# EAGLE board TSC_PROIECT_BOARD (EAGLE 9.7.0), part 1 of 2
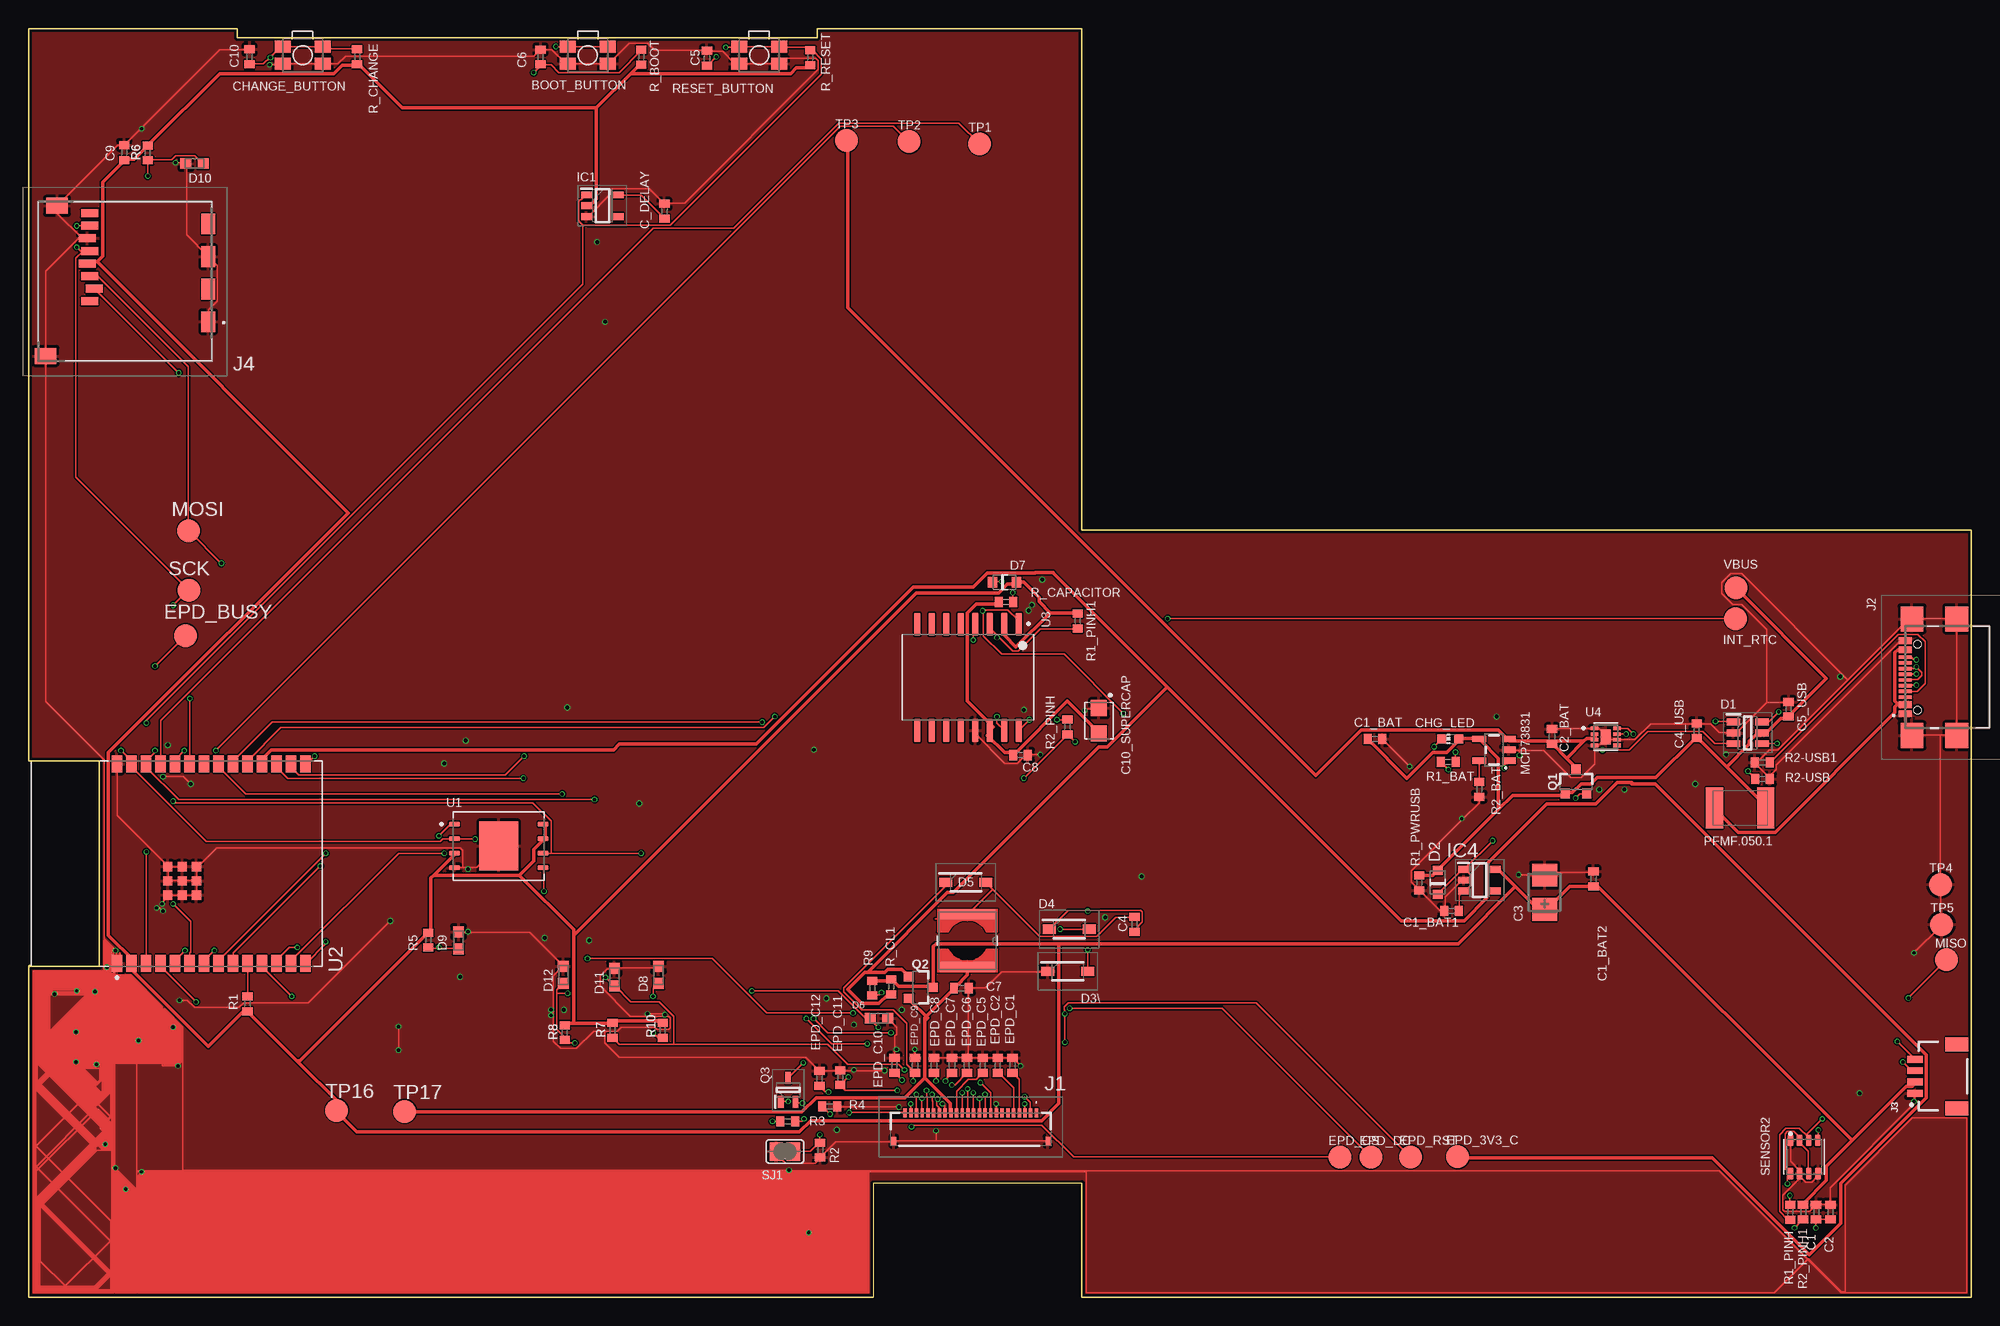
[diagram p0: board, top side]
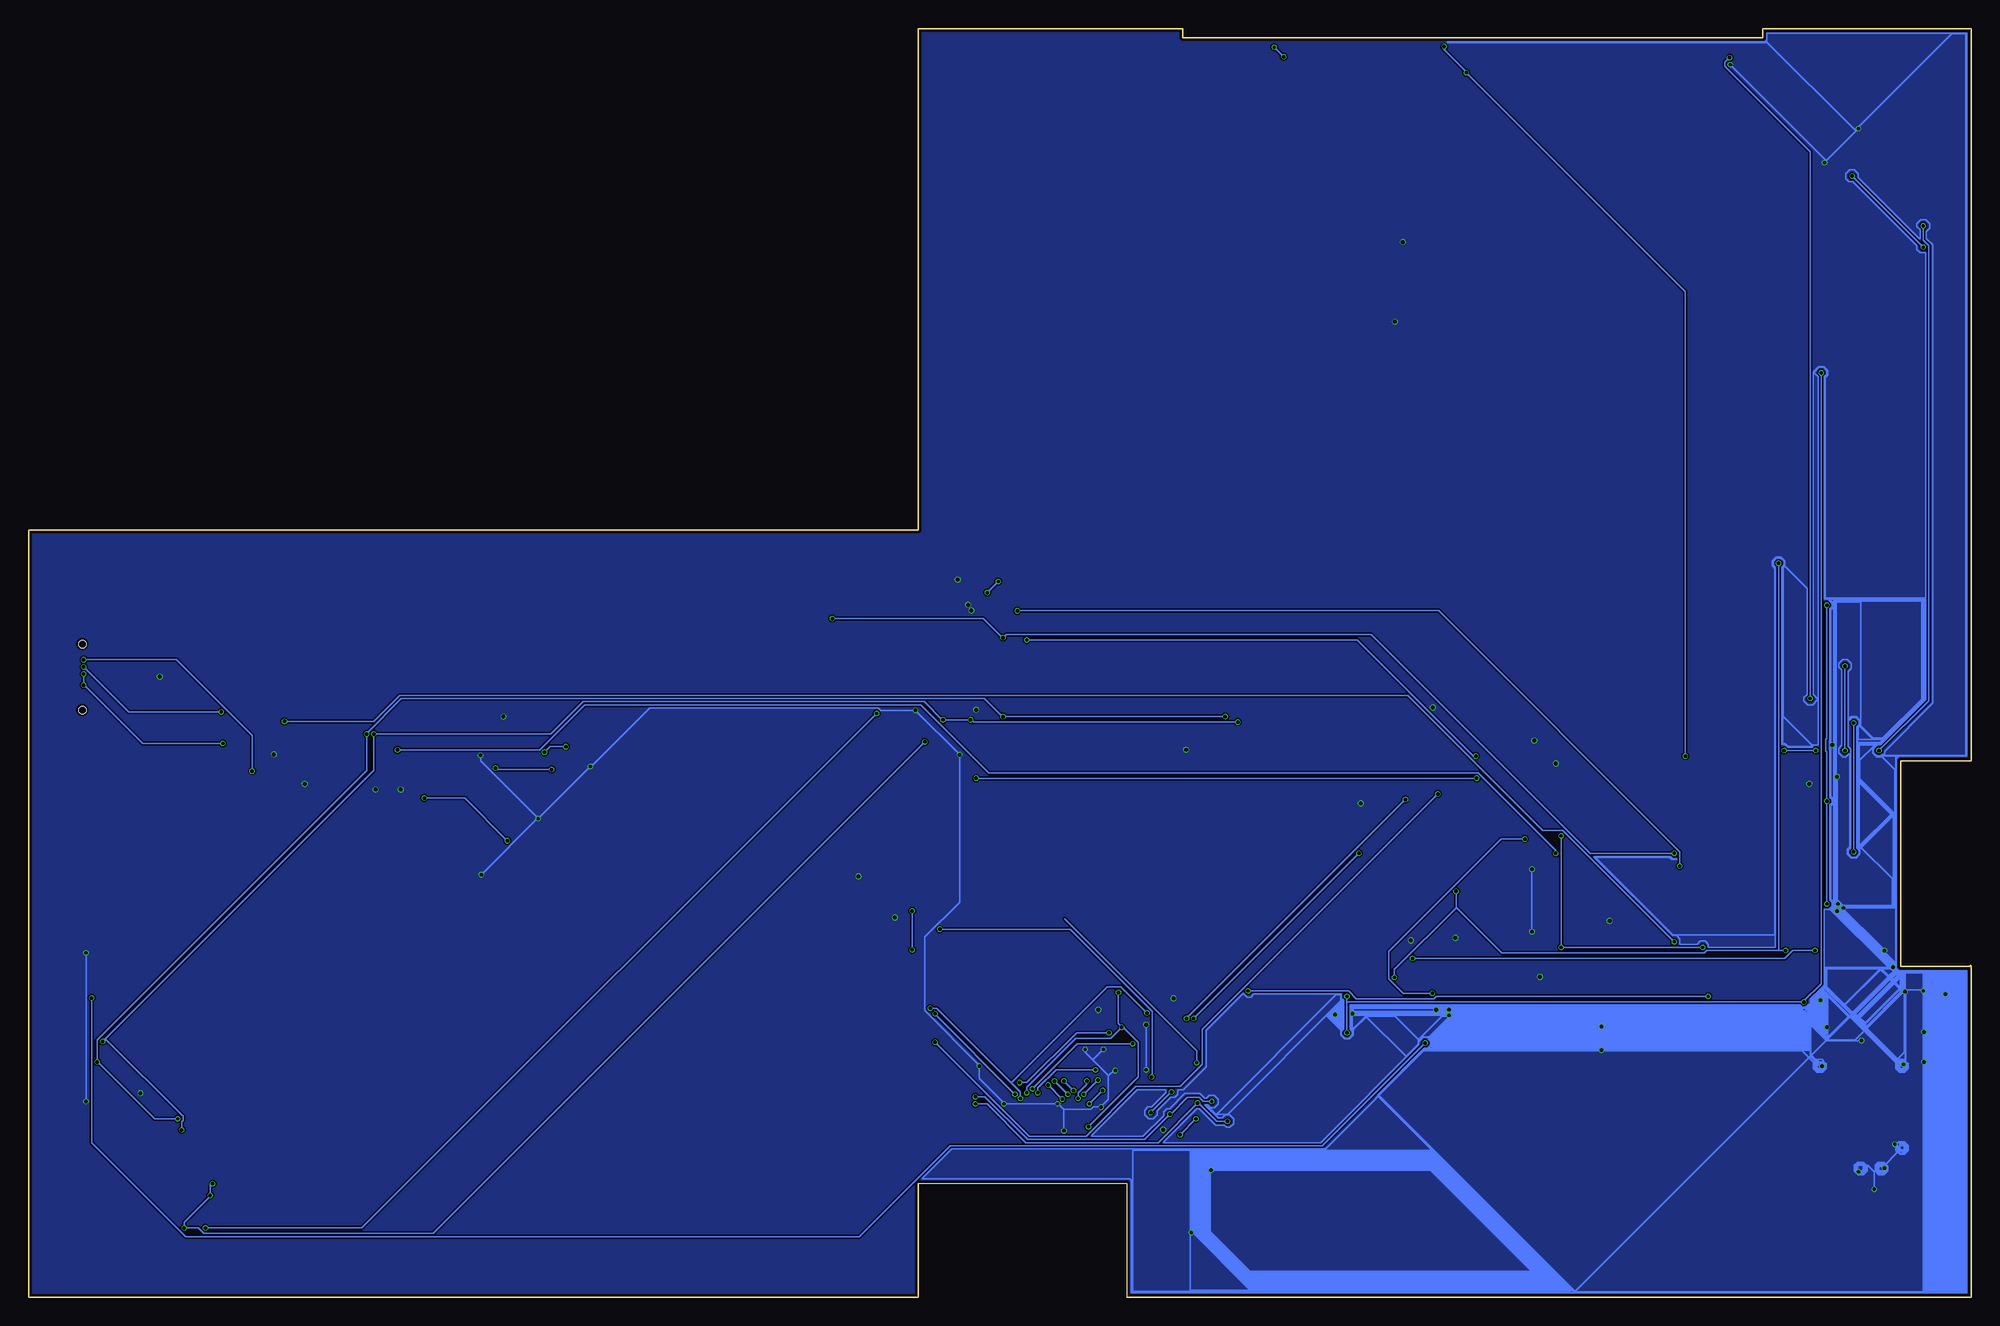
[diagram p1: board, bottom side, seen from below]

Size 170.2 x 111.2 mm. Coordinates in mm from the lower left corner, seen from the top.
Outline: 0,29 0,0 74,0 74,10 92.27,10 92.27,0 170.2,0 170.2,67.24 92.27,67.24 92.27,111.2 69.1,111.2 69.1,110.4 18.3,110.4 18.3,111.2 0,111.2 0,47 6.2,47 6.2,29 0,29
Outline: 0,29 0.1,29.1
Copper layers (1*16): Top 0.035mm / dielectric 1.6mm / Bottom 0.035mm
Design rules "jlcpcb-2layers.dru *": minimum track width 0.15mm, minimum drill 0.3mm, track to track 5mil, track to pad 5mil, pad to pad 5mil, via to via 5mil, smd to smd 5mil, copper to edge 0.2mm, drill to drill 6mil, minimum pad ring 10mil, minimum via ring 3mil, stop-mask expansion 4mil, vias tented up to drill 0mil, thermal gap 10mil
Net classes: 0 default: width 0.15 mm; 1 power: width 0.3 mm
Holes 0.35 mm at 286.6,1.3

## Footprints (pad centres in the part's own frame; a part is rotated, then mirrored left to right if it is on the bottom)
MYBUTTON = smd 1.4 x 1.05: 1 1.75,0.75; 2 -1.75,0.75; 3 -1.75,-0.75; 4 1.75,-0.75
ESP32_WROVER_EAGLE-LTSPICE_C0402 = smd 0.7 x 0.9: 1 -0.65,0; 2 0.65,0
RCL_CT3528 = smd 2 x 2.2: + -1.5,0; - 1.5,0
CAPCP3225X100N = smd 1.4 x 1.4: 1 -1.1,0; 2 1.1,0
ADAFRUIT_CHIP-LED0603 = smd 0.8 x 0.8: A 0,-0.75; C 0,0.75
SOT95P280X145-6N = smd 1.2 x 0.6: 1 -1.25,0.95; 2 -1.25,0; 3 -1.25,-0.95; 4 1.25,-0.95; 5 1.25,0; 6 1.25,0.95
ESP32_WROVER_AVX---SD0805S020S1R0_AVX_SD0805S020S1R0_0 = smd 0.8 x 0.9: 1 -1.05,0; 2 1.05,0
SOD3716X135N = smd 1.15 x 0.8: 1 -1.75,0; 2 1.75,0
DIOC1608X36N = smd 0.97 x 0.94: 1 -0.75,0; 2 0.75,0
TP20R = smd 2 x 2: TP 0,0
SOT95P280X125-5N = smd 0.9 x 0.6: 1 -1.4,0.95; 2 -1.4,0; 3 -1.4,-0.95; 4 1.4,-0.95; 5 1.4,0.95
SOT95P280X120-5N = smd 0.9 x 0.6: 1 -1.4,0.95; 2 -1.4,0; 3 -1.4,-0.95; 4 1.4,-0.95; 5 1.4,0.95
FH34SRJ24S05SH99 = smd 0.3 x 0.8: 1 5.75,1.45; 2 5.25,1.45; 3 4.75,1.45; 4 4.25,1.45; 5 3.75,1.45; 6 3.25,1.45; 7 2.75,1.45; 8 2.25,1.45; 9 1.75,1.45; 10 1.25,1.45; 11 0.75,1.45; 12 0.25,1.45; 13 -0.25,1.45; 14 -0.75,1.45; 15 -1.25,1.45; 16 -1.75,1.45; 17 -2.25,1.45; 18 -2.75,1.45; 19 -3.25,1.45; 20 -3.75,1.45; 21 -4.25,1.45; 22 -4.75,1.45; 23 -5.25,1.45; 24 -5.75,1.45 | smd 0.4 x 0.8: MP1 6.75,-1.05; MP2 -6.75,-1.05
SAMACSYS_PARTS_USB4110GFA = smd 0.3 x 1.15: A1 -3.35,3.678; A4 -2.55,3.678; A5 -1.25,3.678; A6 -0.25,3.678; A7 0.25,3.678; A8 1.25,3.678; A9 2.55,3.678; A12 3.35,3.678; B1 3.05,3.678; B4 2.25,3.678; B5 1.75,3.678; B6 0.75,3.678; B7 -0.75,3.678; B8 -1.75,3.678; B9 -2.25,3.678; B12 -3.05,3.678 | smd 2.18 x 2: MP1 -5.11,-0.827; MP2 5.11,-0.827; MP3 -5.11,3.103; MP4 5.11,3.103 | hole 0.65: -2.89,2.603; 2.89,2.603
JST04_1MM_RA = smd 0.6 x 1.35: 1 -1.5,0; 2 -0.5,0; 3 0.5,0; 4 1.5,0 | smd 1.2 x 2: NC1 2.8,-3.675; NC2 -2.8,-3.675
112ATAARR03ATTEND = smd 1.8 x 1.2: G1 10.6,10.4; G2 4.9,10.4; S1 7.75,10.4; S2 2.05,10.4 | smd 1.4 x 1.9: G3 13.6,-3.85; G4 0.45,-2.85 | smd 0.7 x 1.5: P1 8.8,0; P2 7.7,0.4; P3 6.6,0; P4 5.5,-0.2; P5 4.4,0; P6 3.3,-0.2; P7 2.2,0; P8 1.1,0
IND_4828-WE-TPC_WRE = smd 0.889 x 4.826: 1 -2.286,0; 2 2.286,0
ESP32_WROVER_SPARKFUN-IC-POWER_SOT23-5 = smd 0.55 x 1.2: 1 -0.95,-1.3; 2 0,-1.3; 3 0.95,-1.3; 4 0.95,1.3; 5 -0.95,1.3
ESP32C6_VARISTOR_CT/CN1812 = smd 1.5 x 3.6: 1 -2.25,0; 2 2.25,0
ESP32_WROVER_SPARKFUN-DISCRETESEMI_SOT23-3 = smd 0.8 x 0.9: 1 -0.95,-1; 2 0.95,-1; 3 0,1.1
SOT65P210X110-3N = smd 1.05 x 0.5: 1 -1.05,0.65; 2 -1.05,-0.65; 3 1.05,0
ESP32_WROVER_EAGLE-LTSPICE_R0402 = smd 0.7 x 0.9: 1 -0.65,0; 2 0.65,0
ESP32_WROVER_BME680_PSON80P300X300X100-8N = smd 1.016 x 0.5: 1 1.458,1.2; 2 1.458,0.4; 3 1.458,-0.4; 4 1.458,-1.2; 5 -1.458,-1.22; 6 -1.458,-0.4; 7 -1.458,0.4; 8 -1.458,1.2
SJ = smd 1.168 x 1.6: 1 -0.762,0; 2 0.762,0
SON127P600X800X80-9N = smd 0.94 x 0.44: 1 -3.895,1.905; 2 -3.895,0.635; 3 -3.895,-0.635; 4 -3.895,-1.905; 5 3.895,-1.905; 6 3.895,-0.635; 7 3.895,0.635; 8 3.895,1.905 | smd 3.4 x 4.3: 9 0,0
XCVR_ESP32-C6-WROOM-1-N8 = smd 1.5 x 0.9: 1 -8.75,5.26; 2 -8.75,3.99; 3 -8.75,2.72; 4 -8.75,1.45; 5 -8.75,0.18; 6 -8.75,-1.09; 7 -8.75,-2.36; 8 -8.75,-3.63; 9 -8.75,-4.9; 10 -8.75,-6.17; 11 -8.75,-7.44; 12 -8.75,-8.71; 13 -8.75,-9.98; 14 -8.75,-11.25; 15 8.75,-11.25; 16 8.75,-9.98; 17 8.75,-8.71; 18 8.75,-7.44; 19 8.75,-6.17; 20 8.75,-4.9; 21 8.75,-3.63; 22 8.75,-2.36; 23 8.75,-1.09; 24 8.75,0.18; 25 8.75,1.45; 26 8.75,2.72; 27 8.75,3.99; 28 8.75,5.26 | smd 0.8 x 0.8: 29_1 -2.755,0.79; 29_2 -1.505,0.79; 29_3 -0.255,0.79; 29_4 -2.755,-0.46; 29_5 -1.505,-0.46; 29_6 -0.255,-0.46; 29_7 -2.755,-1.71; 29_8 -1.505,-1.71; 29_9 -0.255,-1.71
SOIC127P1032X265-16N = smd 2.05 x 0.59: 1 -4.655,4.445; 2 -4.655,3.175; 3 -4.655,1.905; 4 -4.655,0.635; 5 -4.655,-0.635; 6 -4.655,-1.905; 7 -4.655,-3.175; 8 -4.655,-4.445; 9 4.655,-4.445; 10 4.655,-3.175; 11 4.655,-1.905; 12 4.655,-0.635; 13 4.655,0.635; 14 4.655,1.905; 15 4.655,3.175; 16 4.655,4.445
SON50P200X200X80-9N = smd 0.762 x 0.3: 1 -0.985,0.75 | smd 0.76 x 0.3: 2 -0.985,0.25; 3 -0.985,-0.25; 4 -0.985,-0.75; 5 0.985,-0.75; 6 0.985,-0.25; 7 0.985,0.25; 8 0.985,0.75 | smd 0.9 x 1.3: 9 0,0

## Placement (x,y rotation side)
BOOT_BUTTON  BUTTON_CUSYOMV1  [MYBUTTON]  49,108.85 180 top
C1  100nF  [ESP32_WROVER_EAGLE-LTSPICE_C0402]  156.59,7.48 90 top
C1_BAT  4.7uF  [ESP32_WROVER_EAGLE-LTSPICE_C0402]  117.95,48.95 0 top
C1_BAT1  4.7uF  [ESP32_WROVER_EAGLE-LTSPICE_C0402]  124.65,33.87 180 top
C1_BAT2  4.7uF  [ESP32_WROVER_EAGLE-LTSPICE_C0402]  137.09,36.67 90 top
C2  100nF  [ESP32_WROVER_EAGLE-LTSPICE_C0402]  157.86,7.49 90 top
C2_BAT  4.7uF  [ESP32_WROVER_EAGLE-LTSPICE_C0402]  133.46,49.15 90 top
C3  100uF TANT  [RCL_CT3528]  132.81,35.5 90 top
C4  4.7uF/25V  [ESP32_WROVER_EAGLE-LTSPICE_C0402]  96.89,32.69 90 top
C4_USB  100nF  [ESP32_WROVER_EAGLE-LTSPICE_C0402]  146.13,49.67 90 top
C5  1uF  [ESP32_WROVER_EAGLE-LTSPICE_C0402]  59.43,108.59 90 top
C5_USB  4.7uF  [ESP32_WROVER_EAGLE-LTSPICE_C0402]  154.18,51.55 90 top
C6  100nF  [ESP32_WROVER_EAGLE-LTSPICE_C0402]  44.85,108.71 90 top
C7  10uF  [ESP32_WROVER_EAGLE-LTSPICE_C0402]  81.72,27.11 0 top
C8  100nF  [ESP32_WROVER_EAGLE-LTSPICE_C0402]  86.9,47.53 0 top
C9  100nF  [ESP32_WROVER_EAGLE-LTSPICE_C0402]  8.38,100.33 90 top
C10  100nF  [ESP32_WROVER_EAGLE-LTSPICE_C0402]  19.36,108.73 90 top
C10_SUPERCAP  CPH3225A  [CAPCP3225X100N]  93.76,50.54 270 top
C_DELAY  100nF  [ESP32_WROVER_EAGLE-LTSPICE_C0402]  55.71,95.19 90 top
CHANGE_BUTTON  BUTTON_CUSYOMV1  [MYBUTTON]  24.01,108.85 180 top
CHG_LED  [ADAFRUIT_CHIP-LED0603]  124.54,48.95 90 top
D1  USBLC6-2SC6Y  [SOT95P280X145-6N]  150.6,49.47 0 top
D2  ESP32_WROVER_AVX---SD0805S020S1R0_AVX_SD0805S020S1R0_0_0AVX_SD0805S020S1R0_0_0  [ESP32_WROVER_AVX---SD0805S020S1R0_AVX_SD0805S020S1R0_0]  123.44,36.38 90 top
D3\  MBR0530  [SOD3716X135N]  91.03,28.58 0 top
D4  MBR0530  [SOD3716X135N]  91.17,32.28 0 top
D5  MBR0530  [SOD3716X135N]  82.11,36.38 0 top
D6  PGB1010603MR  [DIOC1608X36N]  74.5,24.47 0 top
D7  ESP32_WROVER_AVX---SD0805S020S1R0_AVX_SD0805S020S1R0_0_0AVX_SD0805S020S1R0_0_0  [ESP32_WROVER_AVX---SD0805S020S1R0_AVX_SD0805S020S1R0_0]  85.49,62.68 0 top
D8  PGB1010603MR  [DIOC1608X36N]  55.18,28.27 90 top
D9  PGB1010603MR  [DIOC1608X36N]  37.67,31.29 90 top
D10  PGB1010603MR  [DIOC1608X36N]  14.54,99.37 180 top
D11  PGB1010603MR  [DIOC1608X36N]  51.32,28.07 90 top
D12  PGB1010603MR  [DIOC1608X36N]  46.85,28.28 90 top
EPD_3V3_C  TPTP20R  [TP20R]  125.18,12.34 0 top
EPD_BUSY  TPTP20R  [TP20R]  13.77,57.99 0 top
EPD_C1  1uF/50V  [ESP32_WROVER_EAGLE-LTSPICE_C0402]  86.19,20.35 90 top
EPD_C2  1uF/50V  [ESP32_WROVER_EAGLE-LTSPICE_C0402]  84.91,20.33 90 top
EPD_C5  0.1uF/50V  [ESP32_WROVER_EAGLE-LTSPICE_C0402]  83.59,20.33 90 top
EPD_C6  1uF/50V  [ESP32_WROVER_EAGLE-LTSPICE_C0402]  82.2,20.35 90 top
EPD_C7  1uF/50V  [ESP32_WROVER_EAGLE-LTSPICE_C0402]  80.9,20.35 90 top
EPD_C8  1uF/50V  [ESP32_WROVER_EAGLE-LTSPICE_C0402]  79.32,20.33 90 top
EPD_C9  1uF/50V  [ESP32_WROVER_EAGLE-LTSPICE_C0402]  77.65,20.33 90 top
EPD_C10  1uF/50V  [ESP32_WROVER_EAGLE-LTSPICE_C0402]  75.85,20.34 90 top
EPD_C11  1uF/50V  [ESP32_WROVER_EAGLE-LTSPICE_C0402]  71.11,19.27 90 top
EPD_C12  1uF/50V  [ESP32_WROVER_EAGLE-LTSPICE_C0402]  69.29,19.19 90 top
EPD_CS  TPTP20R  [TP20R]  114.87,12.3 0 top
EPD_DC  TPTP20R  [TP20R]  117.59,12.29 0 top
EPD_RST  TPTP20R  [TP20R]  121.08,12.31 0 top
IC1  BD5229G-TR  [SOT95P280X125-5N]  50.27,95.67 0 top
IC4  XC6220A331MR-G  [SOT95P280X120-5N]  127.11,36.57 0 top
INT_RTC  TPTP20R  [TP20R]  149.54,59.49 0 top
J1  FH34SRJ-24S-0.5SH_99_  [FH34SRJ24S05SH99]  82.54,14.74 0 top
J2  SAMACSYS_PARTS_USB4110-GF-A  [SAMACSYS_PARTS_USB4110GFA]  168.09,54.36 90 top
J3  QWIIC_RIGHT_ANGLE  [JST04_1MM_RA]  165.25,19.38 90 top
J4  112A-TAAR-R03_ATTEND  [112ATAARR03ATTEND]  5.35,96.11 270 top
L1  68uH  [IND_4828-WE-TPC_WRE]  82.25,31.27 270 top
MCP73831  ESP32_WROVER_SPARKFUN-IC-POWER_MCP73831  [ESP32_WROVER_SPARKFUN-IC-POWER_SOT23-5]  128.38,47.99 90 top
MISO  TPTP20R  [TP20R]  168.01,29.59 0 top
MOSI  TPTP20R  [TP20R]  14.03,67.19 0 top
PFMF.050.1  ESP32C6_VARISTORCN1812  [ESP32C6_VARISTOR_CT/CN1812]  149.94,42.9 0 top
Q1  20V/4.2A/52mΩ/1.4W  [ESP32_WROVER_SPARKFUN-DISCRETESEMI_SOT23-3]  135.56,45.16 0 top
Q2  20V/4.2A/52mΩ/1.4W  [ESP32_WROVER_SPARKFUN-DISCRETESEMI_SOT23-3]  78.11,27.16 270 top
Q3  SI1308EDL-T1-GE3  [SOT65P210X110-3N]  66.54,18.18 90 top
R1  10K  [ESP32_WROVER_EAGLE-LTSPICE_R0402]  19.18,25.74 90 top
R1_BAT  200  [ESP32_WROVER_EAGLE-LTSPICE_R0402]  124.35,46.93 0 top
R1_PINH  10K  [ESP32_WROVER_EAGLE-LTSPICE_R0402]  154.33,7.47 90 top
R1_PINH1  10K  [ESP32_WROVER_EAGLE-LTSPICE_R0402]  91.91,59.29 90 top
R1_PWRUSB  100K  [ESP32_WROVER_EAGLE-LTSPICE_R0402]  121.82,36.34 90 top
R2  2.2  [ESP32_WROVER_EAGLE-LTSPICE_R0402]  69.34,12.91 90 top
R2-USB  5k1  [ESP32_WROVER_EAGLE-LTSPICE_R0402]  151.9,45.43 0 top
R2-USB1  5k1  [ESP32_WROVER_EAGLE-LTSPICE_R0402]  151.87,46.88 0 top
R2_BAT  2K  [ESP32_WROVER_EAGLE-LTSPICE_R0402]  127.09,44.53 90 top
R2_PINH  10K  [ESP32_WROVER_EAGLE-LTSPICE_R0402]  91.01,50 270 top
R2_PINH1  10K  [ESP32_WROVER_EAGLE-LTSPICE_R0402]  155.45,7.49 90 top
R3  0.47  [ESP32_WROVER_EAGLE-LTSPICE_R0402]  66.52,15.43 0 top
R4  10K  [ESP32_WROVER_EAGLE-LTSPICE_R0402]  70.2,16.75 0 top
R5  10K  [ESP32_WROVER_EAGLE-LTSPICE_R0402]  35.02,31.31 90 top
R6  10K  [ESP32_WROVER_EAGLE-LTSPICE_R0402]  10.44,100.3 90 top
R7  10K  [ESP32_WROVER_EAGLE-LTSPICE_R0402]  51.16,23.41 90 top
R8  10K  [ESP32_WROVER_EAGLE-LTSPICE_R0402]  46.98,23.21 90 top
R9  10K  [ESP32_WROVER_EAGLE-LTSPICE_R0402]  73.9,27.11 90 top
R10  10K  [ESP32_WROVER_EAGLE-LTSPICE_R0402]  55.56,23.41 90 top
R_BOOT  10K  [ESP32_WROVER_EAGLE-LTSPICE_R0402]  53.67,108.69 90 top
R_CAPACITOR  15  [ESP32_WROVER_EAGLE-LTSPICE_R0402]  85.62,60.94 0 top
R_CHANGE  10K  [ESP32_WROVER_EAGLE-LTSPICE_R0402]  28.78,108.72 90 top
R_CL1  10K  [ESP32_WROVER_EAGLE-LTSPICE_R0402]  75.58,27.23 270 top
R_RESET  10K  [ESP32_WROVER_EAGLE-LTSPICE_R0402]  68.47,108.65 90 top
RESET_BUTTON  BUTTON_CUSYOMV1  [MYBUTTON]  64,108.85 180 top
SCK  TPTP20R  [TP20R]  14.05,61.99 0 top
SENSOR2  ESP32_WROVER_BME680_BME680  [ESP32_WROVER_BME680_PSON80P300X300X100-8N]  155.54,12.32 90 top
SJ1  [SJ]  66.26,12.79 0 top
TP1  TPTP20R  [TP20R]  83.31,101.09 0 top
TP2  TPTP20R  [TP20R]  77.13,101.29 0 top
TP3  TPTP20R  [TP20R]  71.65,101.39 0 top
TP4  TPTP20R  [TP20R]  167.47,36.19 0 top
TP5  TPTP20R  [TP20R]  167.59,32.69 0 top
TP16  TPTP20R  [TP20R]  26.99,16.39 0 top
TP17  TPTP20R  [TP20R]  32.94,16.29 0 top
U1  W25Q512JVEIQ  [SON127P600X800X80-9N]  41.19,39.56 0 top
U2  ESP32-C6-WROOM-1-N8  [XCVR_ESP32-C6-WROOM-1-N8]  13,38.01 90 top
U3  DS3231SN#  [SOIC127P1032X265-16N]  82.3,54.35 270 top
U4  MAX17048G+T10  [SON50P200X200X80-9N]  138.17,49.12 0 top
VBUS  TPTP20R  [TP20R]  149.59,62.19 0 top

## Library data of the parts
BOOT_BUTTON CHANGE_BUTTON CHG_LED EPD_3V3_C EPD_BUSY EPD_CS EPD_DC EPD_RST INT_RTC MISO MOSI PFMF.050.1 RESET_BUTTON SCK SJ1 TP1-TP5 TP16 TP17 VBUS = DeskAssistant v19 v1
C1 C1_BAT C1_BAT1 C1_BAT2 C2 C2_BAT C4 C4_USB C5 C5_USB C6-C10 C_DELAY EPD_C1 EPD_C2 EPD_C5-EPD_C12 = DeskAssistant v19 v1; SPICEMODEL: NONE; SPICEPREFIX: C
C3 = DeskAssistant v19 v1; SPICEPREFIX: C
C10_SUPERCAP = DeskAssistant v19 v1; AVAILABILITY: Not in stock; CHECK_PRICES: https://www.snapeda.com/parts/CPH3225A/Seiko+Instruments/view-part/?ref=eda; DESCRIPTION: 11 mF (EDLC) Supercapacitor 3.3 V 1210 (3225 Metric) - -; MF: Seiko Instruments; MP: CPH3225A; PACKAGE: 1210 Seiko; PRICE: None; PURCHASE-URL: https://www.snapeda.com/api/url_track_click_mouser/?unipart_id=562593&manufacturer=Seiko Instruments&part_name=CPH3225A&search_term=None; SNAPEDA_LINK: https://www.snapeda.com/parts/CPH3225A/Seiko+Instruments/view-part/?ref=snap
D1 = DeskAssistant v19 v1; AVAILABILITY: In Stock; CHECK_PRICES: https://www.snapeda.com/parts/USBLC6-2SC6Y/STMicroelectronics/view-part/?ref=eda; DESCRIPTION: 17V Clamp 5A (8/20µs) Ipp Tvs Diode Surface Mount SOT-23-6; MF: STMicroelectronics; MP: USBLC6-2SC6Y; PACKAGE: SOT-23-6 STMicroelectronics; PRICE: None; SNAPEDA_LINK: https://www.snapeda.com/parts/USBLC6-2SC6Y/STMicroelectronics/view-part/?ref=snap
D2 D7 = DeskAssistant v19 v1; CENTROID_NOT_SPECIFIED: No; DATASHEET: http://datasheets.avx.com/schottky.pdf; DIGIKEY_DESCRIPTION: DIODE SCHOTTKY 20V 1A 0805; DIGIKEY_PART_NUMBER: 478-7800-1-ND; LEAD_FREE: yes; MF: AVX; MOUSER_PART_NUMBER: 581-SD0805S020S1R0; PACKAGE: 0805 (2012 metric); PREFIX: D; ROHS: yes; TEMPERATURE_RANGE_HIGH: +125°C; TEMPERATURE_RANGE_LOW: -55°C
D3\ D4 D5 = DeskAssistant v19 v1; AVAILABILITY: In Stock; CHECK_PRICES: https://www.snapeda.com/parts/MBR0530/Onsemi/view-part/?ref=eda; DESCRIPTION: Diode Schottky 30 V 500mA Surface Mount SOD-123; MF: ON Semiconductor; MP: MBR0530; PACKAGE: SOD-123-2 ON Semiconductor; PRICE: None; PURCHASE-URL: https://www.snapeda.com/api/url_track_click_mouser/?unipart_id=179458&manufacturer=ON Semiconductor&part_name=MBR0530&search_term=None; SNAPEDA_LINK: https://www.snapeda.com/parts/MBR0530/Onsemi/view-part/?ref=snap
D6 D8-D12 = DeskAssistant v19 v1; AVAILABILITY: In Stock; CHECK_PRICES: https://www.snapeda.com/parts/PGB1010603MR/Littelfuse/view-part/?ref=eda; DESCRIPTION: 150V (Typ) Clamp - Ipp Tvs Diode Surface Mount 0603 (1608 Metric); MF: Littelfuse Inc.; MP: PGB1010603MR; PACKAGE: 0603 Littelfuse Inc.; PRICE: None; PURCHASE-URL: https://www.snapeda.com/api/url_track_click_mouser/?unipart_id=5659453&manufacturer=Littelfuse Inc.&part_name=PGB1010603MR&search_term=None; SNAPEDA_LINK: https://www.snapeda.com/parts/PGB1010603MR/Littelfuse/view-part/?ref=snap
IC1 = DeskAssistant v19 v1; DESCRIPTION: Voltage Detector with Adjustable Delay Time: CMOS processes are utilized to develop high precision, low current consumption CMOS reset ICs that allow arbitrary setting of the delay time. The extensive lineup includes both Nch Open Drain and CMOS output types in a wide range of detection voltages (from 2.3V to 6.0V, in 0.1V steps), enabling selection of the ideal solution based on customer requirements. In addition, the entire series is of course both lead-free and RoHS-compliant.; HEIGHT: 1.25mm; MANUFACTURER_NAME: ROHM Semiconductor; MANUFACTURER_PART_NUMBER: BD5229G-TR; MOUSER_PART_NUMBER: 755-BD5229G-TR; MOUSER_PRICE-STOCK: https://www.mouser.co.uk/ProductDetail/ROHM-Semiconductor/BD5229G-TR?qs=4kLU8WoGk0vvnhrrYwdszw%3D%3D
IC4 = DeskAssistant v19 v1; DESCRIPTION: LDO Voltage Regulators; HEIGHT: 1.2mm; MANUFACTURER_NAME: Torex; MANUFACTURER_PART_NUMBER: XC6220A331MR-G; MOUSER_PART_NUMBER: 865-XC6220A331MR-G; MOUSER_PRICE-STOCK: https://www.mouser.co.uk/ProductDetail/Torex-Semiconductor/XC6220A331MR-G?qs=AsjdqWjXhJ8ZSWznL1J0gg%3D%3D
J1 = DeskAssistant v19 v1; DESCRIPTION: 24 Position FFC, FPC Connector Contacts, Top and Bottom 0.020" (0.50mm) Surface Mount, Right Angle; HEIGHT: 1.1mm; MANUFACTURER_NAME: Hirose; MANUFACTURER_PART_NUMBER: FH34SRJ-24S-0.5SH(99); MOUSER_PART_NUMBER: 798-FH34SRJ24S05SH99; MOUSER_PRICE-STOCK: https://www.mouser.co.uk/ProductDetail/Hirose-Connector/FH34SRJ-24S-0.5SH99?qs=vcbW%252B4%252BSTIpKBl5ap9J8Fw%3D%3D
J2 = DeskAssistant v19 v1; DESCRIPTION: CONN USB 2.0 TYPE-C R/A SMT; HEIGHT: 3.26mm; MANUFACTURER_NAME: GCT (GLOBAL CONNECTOR TECHNOLOGY); MANUFACTURER_PART_NUMBER: USB4110-GF-A; MOUSER_PART_NUMBER: 640-USB4110-GF-A; MOUSER_PRICE-STOCK: https://www.mouser.co.uk/ProductDetail/GCT/USB4110-GF-A?qs=KUoIvG%2F9IlYiZvIXQjyJeA%3D%3D
J3 = DeskAssistant v19 v1; PROD_ID: CONN-13694
J4 = DeskAssistant v19 v1; DESCRIPTION: Micro SD Card Socket, Push-Push Type, Top Mount, SMT, H=1.83mm, 10u; HEIGHT: 1.9mm; MANUFACTURER_NAME: ATTEND; MANUFACTURER_PART_NUMBER: 112A-TAAR-R03 ATTEND
L1 = DeskAssistant v19 v1; COPYRIGHT: Copyright (C) 2024 Ultra Librarian. All rights reserved.; MANUFACTURER_PART_NUMBER: 744043680; MFR_NAME: Wurth Electronics
MCP73831 = DeskAssistant v19 v1; PROD_ID: IC-09995
Q1 Q2 = DeskAssistant v19 v1; PROD_ID: TRAN-14388
Q3 = DeskAssistant v19 v1; AVAILABILITY: In Stock; CHECK_PRICES: https://www.snapeda.com/parts/SI1308EDL-T1-GE3/Vishay+Siliconix/view-part/?ref=eda; DESCRIPTION: Si1308EDL-T1-GE3 N-channel MOSFET Transistor, 1.5 A, 30 V, 3-Pin SC-70 | Siliconix / Vishay SI1308EDL-T1-GE3; MF: Vishay Siliconix; MP: SI1308EDL-T1-GE3; PACKAGE: SOT-323 Vishay Semiconductor; PRICE: None; PURCHASE-URL: https://www.snapeda.com/api/url_track_click_mouser/?unipart_id=274603&manufacturer=Vishay Siliconix&part_name=SI1308EDL-T1-GE3&search_term=None; SNAPEDA_LINK: https://www.snapeda.com/parts/SI1308EDL-T1-GE3/Vishay+Siliconix/view-part/?ref=snap
R1 R1_BAT R1_PINH R1_PINH1 R1_PWRUSB R2 R2-USB R2-USB1 R2_BAT R2_PINH R2_PINH1 R3-R10 R_BOOT R_CAPACITOR R_CHANGE R_CL1 R_RESET = DeskAssistant v19 v1; SPICEMODEL: NONE; SPICEPREFIX: R
SENSOR2 = DeskAssistant v19 v1; AVAILABILITY: Unavailable; DESCRIPTION: Integrated Environmental Unit; MF: Bosch Sensortec; MP: BME680; PACKAGE: LGA-8 Bosch Tools; PRICE: None
U1 = DeskAssistant v19 v1; AVAILABILITY: In Stock; CHECK_PRICES: https://www.snapeda.com/parts/W25Q512JVEIQ/Winbond+Electronics/view-part/?ref=eda; DESCRIPTION: FLASH - NOR Memory IC 512Mb (64M x 8) SPI - Quad I/O 133 MHz 8-WSON (8x6); MF: Winbond Electronics; MP: W25Q512JVEIQ; PACKAGE: Package; PRICE: None; SNAPEDA_LINK: https://www.snapeda.com/parts/W25Q512JVEIQ/Winbond+Electronics/view-part/?ref=snap
U2 = DeskAssistant v19 v1; AVAILABILITY: In Stock; CHECK_PRICES: https://www.snapeda.com/parts/ESP32-C6-WROOM-1-N8/Espressif+Systems/view-part/?ref=eda; DESCRIPTION: Multiprotocol Modules ESP32-C6 module, Wi-Fi 6 in 2.4 GHz band, Bluetooth 5, Zigbee 3.0 and Thread. ESP34-WROOM Compatible - ENGINEERING SAMPLE; MF: Espressif Systems; MP: ESP32-C6-WROOM-1-N8; PACKAGE: None; PRICE: None; SNAPEDA_LINK: https://www.snapeda.com/parts/ESP32-C6-WROOM-1-N8/Espressif+Systems/view-part/?ref=snap
U3 = DeskAssistant v19 v1; AVAILABILITY: In Stock; CHECK_PRICES: https://www.snapeda.com/parts/DS3231SN%23/Analog+Devices/view-part/?ref=eda; DESCRIPTION: Extremely Accurate I²C-Integrated RTC/TCXO/Crystal; MF: Analog Devices; MP: DS3231SN#; PACKAGE: SOIC-16 Maxim; PRICE: None; PURCHASE-URL: https://www.snapeda.com/api/url_track_click_mouser/?unipart_id=99048&manufacturer=Analog Devices&part_name=DS3231SN#&search_term=None; SNAPEDA_LINK: https://www.snapeda.com/parts/DS3231SN%23/Analog+Devices/view-part/?ref=snap
U4 = DeskAssistant v19 v1; AVAILABILITY: In Stock; CHECK_PRICES: https://www.snapeda.com/parts/MAX17048G+T10/Analog+Devices/view-part/?ref=eda; DESCRIPTION: 3µA 1-Cell/2-Cell Fuel Gauge with ModelGauge; MF: Analog Devices; MP: MAX17048G+T10; PACKAGE: TDFN-8 Maxim; PRICE: None; PURCHASE-URL: https://www.snapeda.com/api/url_track_click_mouser/?unipart_id=329239&manufacturer=Analog Devices&part_name=MAX17048G+T10&search_term=None; SNAPEDA_LINK: https://www.snapeda.com/parts/MAX17048G+T10/Analog+Devices/view-part/?ref=snap

## Nets
3V3 [power]: C1_BAT2.1 C3.+ C9.1 D7.2 IC1.2 IC4.5 J3.2 J4.P4 Q2.3 R1.1 R1_PINH1.2 R2_PINH1.2 R5.2 R6.2 R7.2 R8.2 R9.2 R10.2 R_BOOT.1 R_CHANGE.1 R_CL1.1 R_RESET.1 TP16.TP U1.3 U1.7 U1.8 U2.2 U3.2
32KHZ: R2_PINH1.1 U2.9 U3.1
DN: D1.4 J2.A7 J2.B7
DP: D1.6 J2.A6 J2.B6
EPD_3V3 [power]: C7.1 J1.16 L1.2 Q2.2 TP17.TP
EPD_3V3_C [power]: EPD_3V3_C.TP Q2.1 R_CL1.2 U2.18
EPD_BUSY: EPD_BUSY.TP J1.9 U2.26
EPD_CS: D6.1 EPD_CS.TP J1.12 R9.1 U2.11
EPD_DC: EPD_DC.TP J1.11 U2.5
EPD_RST: EPD_RST.TP J1.10 U2.21
FLASH_CS: D9.1 R5.1 U1.1 U2.12
GDR: J1.2 Q3.1 R4.1
GND: BOOT_BUTTON.1 BOOT_BUTTON.2 C1.2 C1_BAT1.2 C1_BAT2.2 C1_BAT.2 C2.2 C2_BAT.2 C3.- C4_USB.2 C5.2 C5_USB.2 C6.2 C7.2 C8.2 C9.2 C10.2 C10_SUPERCAP.1 C_DELAY.2 CHANGE_BUTTON.1 CHANGE_BUTTON.2 D1.2 D3\.1 D6.2 D8.2 D9.2 D10.2 D11.2 D12.2 EPD_C1.2 EPD_C2.2 EPD_C5.2 EPD_C6.2 EPD_C7.2 EPD_C8.2 EPD_C9.2 EPD_C10.2 EPD_C11.2 EPD_C12.2 IC1.3 IC4.2 J1.8 J1.17 J1.MP1 J1.MP2 J2.A1 J2.A12 J2.B1 J2.B12 J2.MP1 J2.MP2 J2.MP3 J2.MP4 J3.1 J4.G1 J4.G2 J4.G3 J4.G4 J4.P6 MCP73831.2 R1_PWRUSB.1 R2-USB1.1 R2-USB.2 R2.1 R2_BAT.1 R4.2 RESET_BUTTON.1 RESET_BUTTON.2 SENSOR2.1 SENSOR2.5 SENSOR2.7 SJ1.1 TP4.TP TP5.TP U1.4 U1.9 U2.1 U2.28 U2.29_1 U2.29_2 U2.29_3 U2.29_4 U2.29_5 U2.29_6 U2.29_7 U2.29_8 U2.29_9 U3.13 U4.1 U4.4 U4.6 U4.9
GPIO8: R1.2 U2.10
I2C_PW: C1.1 C2.1 R1_PINH.2 R2_PINH.2 SENSOR2.2 SENSOR2.6 SENSOR2.8 U2.17
INT_RTC: INT_RTC.TP R1_PINH1.1 U2.8 U3.3
IO/BOOT: BOOT_BUTTON.3 BOOT_BUTTON.4 C6.1 R_BOOT.2 U2.15
IO/CHANGE: C10.1 CHANGE_BUTTON.3 CHANGE_BUTTON.4 R_CHANGE.2 U2.23
MISO: D12.1 J4.P7 MISO.TP R8.1 U1.2 U2.27
MOSI: D11.1 J1.14 J4.P3 MOSI.TP R7.1 U1.5 U2.7
N$1: J2.B5 R2-USB.1
N$2: J2.A5 R2-USB1.2
N$3: C1_BAT1.1 D2.1 IC4.1 IC4.3 Q1.2
N$4: C4.1 D3\.2 D4.1
N$5: EPD_C10.1 J1.22
N$6: EPD_C5.1 J1.15
N$7: CHG_LED.C R1_BAT.2
N$8: MCP73831.1 R1_BAT.1
N$9: EPD_C8.1 J1.20
N$10: MCP73831.5 R2_BAT.2
N$11: EPD_C2.1 J1.5
N$12: D7.1 R_CAPACITOR.2
N$13: C_DELAY.1 IC1.5
N$15: EPD_C12.1 J1.24
N$16: EPD_C7.1 J1.19
N$17: EPD_C1.1 J1.4
N$18: EPD_C6.1 J1.18
PREVGH: D5.1 EPD_C9.1 J1.21
PREVGL: D4.2 EPD_C11.1 J1.23
RESE: J1.3 Q3.2 R3.1
RESE': R2.2 R3.2 SJ1.2
RESET: C5.1 IC1.1 R_RESET.2 RESET_BUTTON.3 RESET_BUTTON.4 U2.3
RTC_RST: U2.16 U3.4
RX: TP2.TP U2.24
SCK: D10.1 J1.13 J4.P5 R6.1 SCK.TP U1.6 U2.6
SCL: J3.4 R2_PINH.1 SENSOR2.4 U2.20 U3.16 U4.7
SDA: J3.3 R1_PINH.1 SENSOR2.3 U2.19 U3.15 U4.8
SRC: C4.2 D5.2 L1.1 Q3.3
SS_SD: D8.1 J4.P2 R10.1 U2.4
TX: TP1.TP U2.25
USB_D+: D1.1 U2.14
USB_D-: D1.3 U2.13
VBAT [power]: C2_BAT.1 MCP73831.3 Q1.3 TP3.TP U4.2 U4.3
VBUS [power]: C1_BAT.1 C4_USB.1 C5_USB.1 CHG_LED.A D1.5 D2.2 MCP73831.4 PFMF.050.1.2 Q1.1 R1_PWRUSB.2 VBUS.TP
VRTC [power]: C8.1 C10_SUPERCAP.2 R_CAPACITOR.1 U3.14
VUSB [power]: J2.A4 J2.A9 J2.B4 J2.B9 PFMF.050.1.1

## Tracks (layer width: path | path; a pad name or v marks a point on that pad's centre or on a via)
3V3
  Top 0.3: 159.75,13.75 164.5,18.5 165,18.5 165.25,18.75 J3.2 | 159.75,13.75 157.5,11.5 157.5,10.25 155.5,8.25 R2_PINH1.2 | R9.2 74,27.75 75.5,27.75 R_CL1.1 75.75,27.75 76.25,27.25 79,27.25 Q2.3 79.25,27.25 79.25,30.75 79.5,31 90.25,31 | 130.25,36 132.5,33.75 132.75,34 C3.+ 133,34 135,36 137,36 C1_BAT2.1 137.25,36.25 159.75,13.75 | 130.25,36 128.75,37.5 IC4.5 | 90.25,31 125.25,31 130.25,36 | 49.75,104.25 49.75,96.25 49.25,95.75 49,95.75 IC1.2 | 52.75,107.25 53.5,108 R_BOOT.1 | 52.75,107.25 49.75,104.25 | 52.75,107.25 66.75,107.25 67.25,107.75 68.25,107.75 R_RESET.1 | 6,90.75 5.25,90.75 J4.P4 | 6,90.75 6.5,91.25 6.5,97.75 8.25,99.5 C9.1 8.5,99.75 9.25,99.75 10.25,100.75 R6.2 10.5,101 16.75,107.25 26.75,107.25 27.5,108 28.75,108 R_CHANGE.1 29,108 32.75,104.25 49.75,104.25 | 23.5,20.75 27.25,17 26.75,16.5 TP16.TP 27,16.25 28.75,14.5 67.5,14.5 68.5,15.5 88.75,15.5 90.25,17 90.25,31 | 23.5,20.75 19.25,25 R1.1 19,25.25 15.75,22 9.25,28.5 9.25,29.25 U2.2 9.25,29.5 7,31.75 7,47.75 28,68.75 6,90.75 | 89.5,60 91.75,60 R1_PINH1.2 | 89.5,60 86.5,57 85.5,58 85.5,59 U3.2 | 47.75,24 51,24 R7.2 51.25,24.25 55.5,24.25 R10.2 | 47.75,24 47,24 R8.2 | U1.8 45.25,41.25 45.25,40.25 U1.7 45,40 44.25,39.25 44.25,38.25 43,37 | 35.5,37 37.25,38.75 U1.3 | 35.5,37 35.25,36.75 35.25,32 R5.2 35,32 23.75,20.75 23.5,20.75 | 35.5,37 43,37 | 47.75,31.75 47.75,32.25 43,37 | 47.75,31.75 47.75,24 | 47.75,31.75 77.75,61.75 85,61.75 85.75,62.5 86.5,62.5 D7.2 87.18,62.68 88.53,61.33 88.53,60.97 89.5,60
32KHZ  (via drill 0.3)
  Top 0.15: v154.7,6.09 155.4,6.79 R2_PINH1.1 | v95.91,51.18 90.72,56.37 85.25,56.37 83.65,57.96 83.65,60.04 | 83.65,60.04 83.86,60.25 85.8,60.25 86.7,59.35 86.7,59.07 U3.1 | v25.55,37.81 17.94,30.19 17.94,29.29 U2.9 | v83.58,60.18 83.65,60.11 83.65,60.04
  Bottom 0.15: v154.7,6.09 140.99,6.09 v95.91,51.18 | v25.55,37.81 25.55,39.06 46.67,60.18 v83.58,60.18
DN  (via drill 0.3)
  Top 0.15: v165.37,53.67 164.47,53.67 J2.B7 | v165.37,54.64 164.47,54.64 J2.A7 | v153.18,48.54 151.87,48.54 D1.4
  Bottom 0.15: v165.37,54.64 v165.37,53.67 165.3,53.67 160.18,48.54 v153.18,48.54
DP  (via drill 0.3)
  Top 0.15: 165.37,55.12 164.47,55.12 J2.B6 | 165.37,55.12 165.51,55.12 165.85,54.78 165.85,54.5 165.51,54.15 164.47,54.15 J2.A6 | v153.32,51.31 152.49,50.48 151.87,50.48 D1.6 | v165.37,55.26 165.37,55.12
  Bottom 0.15: v153.32,51.31 161.42,51.31 v165.37,55.26
EPD_3V3
  Top 0.3: 78.5,19.25 80.75,17 80.75,16.25 J1.16 | 78.5,24.25 78.5,24.5 81,27 C7.1 81.25,27.25 82.25,28.25 L1.2 | 78.5,24.25 78.5,19.25 | 78.5,24.25 78.75,24.5 77.25,26 Q2.2 | 78.5,19.25 76.75,17.5 69,17.5 67.75,16.25 33,16.25 TP17.TP
EPD_3V3_C
  Top 0.3: 73.5,28.5 75,28.5 75.25,28.75 76.5,28.75 77,28.25 Q2.1 | 73.5,28.5 73.25,28.5 71.75,27 73,25.75 74.5,25.75 75.25,26.5 75.5,26.5 R_CL1.2 | 99.75,53.5 89.75,63.5 89.75,63.53 88.17,63.53 88.17,63.5 84,63.5 82.75,62.25 77.5,62.25 63.75,48.5 51.75,48.5 51.25,48 21.25,48 20.5,47.25 20.5,47 U2.18 | 99.75,53.5 94.5,48.25 93.75,48.25 81,35.5 80.5,35.5 73.5,28.5 | 99.75,53.5 120.25,33 125.75,33 127.75,35 127.75,38 133,43.25 137.29,43.25 139.17,45.13 140.43,45.13 140.43,45 142.5,45 166.25,21.25 166.25,17.5 158.75,10 158.75,6.5 156,3.75 147.5,12.25 125.25,12.25 EPD_3V3_C.TP
EPD_BUSY  (via drill 0.3)
  Top 0.15: v83.38,18.84 84.28,17.94 84.28,16.2 J1.9 | v75.55,23.2 70.01,23.2 v68.77,24.45 | v49.58,43.63 13.16,43.63 10.32,46.47 10.32,46.74 U2.26 10.32,46.81 10.32,47.02 11.08,47.78 v11.08,47.92 | v11.08,55.33 13.71,57.96 EPD_BUSY.TP
  Bottom 0.15: v83.38,18.84 82.75,18.84 78.39,23.2 v75.55,23.2 | v49.58,43.63 v68.77,24.45 | v11.08,47.92 v11.08,55.33
EPD_CS  (via drill 0.3)
  Top 0.15: v82.75,17.94 82.75,16.2 J1.12 | v74.44,23.68 73.68,24.45 D6.1 73.61,24.45 73.34,24.45 70.91,26.87 v63.36,26.87 | v74.72,26.73 74.51,26.52 73.96,26.52 R9.1 | v23.06,26.38 20.5,28.95 20.5,29.22 U2.11 | v77.35,14.96 77.49,15.1 88.78,15.1 91.55,12.33 114.82,12.33 EPD_CS.TP
  Bottom 0.15: v82.75,17.94 82.75,18.42 78.46,22.71 75.41,22.71 v74.44,23.68 | v74.72,26.73 74.72,24.03 74.44,23.75 v74.44,23.68 | v23.06,26.38 46.88,26.38 47.09,26.18 53.88,26.18 54.57,26.87 v63.36,26.87 | v77.35,14.96 72.99,19.32 72.99,22.37 74.37,23.75 v74.44,23.68
EPD_DC  (via drill 0.3)
  Top 0.15: v83.31,17.45 83.31,16.2 J1.11 | v91.2,25.35 104.57,25.35 117.59,12.33 EPD_DC.TP | v13.71,30.4 12.88,29.57 12.88,29.29 U2.5 | v48.96,29.71 59.9,29.71 64.68,24.93 v72.23,24.93
  Bottom 0.15: v83.31,17.45 83.31,18 84.1,18.8 | 84.1,18.8 90.65,25.35 v91.2,25.35 | v13.71,30.4 15.65,30.4 16.34,29.71 v48.96,29.71 | v72.23,24.93 74.51,27.21 75.69,27.21 84.1,18.8
EPD_RST  (via drill 0.3)
  Top 0.15: v83.79,17.8 83.79,16.2 J1.10 | EPD_RST.TP 121.05,12.33 107.55,25.83 91.06,25.83 90.72,25.48 90.72,25.21 90.79,25.14 v90.79,24.86 v90.79,22.37 | v46.74,44.11 19.04,44.11 16.69,46.47 16.69,46.74 U2.21
  Bottom 0.15: v83.79,17.8 90.79,24.79 v90.79,24.86 | v46.74,44.11 67.38,23.48 67.38,20.43 69.32,18.49 73.2,18.49 77.56,14.13 82.55,14.13 v90.79,22.37
FLASH_CS  (via drill 0.3)
  Top 0.15: 35.94,30.61 37.6,30.61 D9.1 | 35.94,30.61 35.04,30.61 R5.1 | v35.94,40.44 36.91,41.41 37.26,41.41 U1.1 | v35.94,30.68 35.94,30.61 | v23.55,30.68 22.85,30.68 21.74,29.57 21.74,29.29 U2.12
  Bottom 0.15: v35.94,40.44 v35.94,30.68 v23.55,30.68
GDR  (via drill 0.3)
  Top 0.15: v87.25,17.59 87.74,17.11 87.74,16.2 J1.2 | v70.22,16.07 69.6,16.69 R4.1 | v66.55,17.17 65.93,17.17 Q3.1
  Bottom 0.15: v87.25,17.59 86.42,17.59 82.68,13.85 72.44,13.85 v70.22,16.07 70.15,16.07 68.7,17.52 67.66,17.52 67.31,17.17 v66.55,17.17
GND  (via drill 0.3, 0.35)
  Top 0.15: J2.A12 164.4,57.69 164.4,57.48 J2.B1 164.33,57.48 163.91,57.48 153.11,46.67 153.11,46.26 152.49,45.64 R2-USB.2 152.56,45.5 151.24,46.81 R2-USB1.1 151.31,46.81 152.49,47.99 153.25,47.99 159.38,54.12 | 155.26,10.53 155.67,10.11 156.23,10.11 156.71,10.6 156.71,10.8 SENSOR2.5 | 155.26,10.53 155.19,10.6 155.19,10.8 SENSOR2.7 | SENSOR2.1 154.36,13.71 154.36,11.91 155.12,11.15 155.12,10.87 SENSOR2.7 | 155.26,10.53 153.67,8.93 153.67,7.69 153.8,7.55 156.02,7.55 156.57,8.1 C1.2 156.64,8.17 157.82,8.17 C2.2 157.82,8.24 157.82,9.63 165.23,17.04 165.23,17.17 | 155.26,10.53 SENSOR2.7 | 165.23,17.17 165.23,17.87 J3.1 | J2.B12 164.4,51.24 164.4,51.04 J2.A1 164.47,50.97 164.47,49.79 164.95,49.31 J2.MP3 165.02,49.31 167.45,49.31 | 167.45,49.31 168.9,49.31 J2.MP1 168.9,49.38 168.9,59.42 J2.MP2 168.9,59.49 165.02,59.49 J2.MP4 164.95,59.42 164.68,59.42 159.38,54.12 | 167.45,49.31 167.45,36.22 TP4.TP 167.52,36.15 167.52,32.83 167.59,32.76 TP5.TP 167.59,32.62 v165.16,30.19 | v165.16,17.17 165.23,17.17 | 152.28,52.15 154.15,52.15 C5_USB.2 | 152.28,52.15 149.65,49.51 149.37,49.51 D1.2 149.3,49.51 148.13,49.51 147.36,50.28 146.19,50.28 C4_USB.2 146.12,50.28 142.1,50.28 140.72,48.89 139.19,48.89 U4.6 139.12,48.89 138.5,48.89 138.29,49.1 U4.9 | U4.9 138.22,49.1 137.53,48.41 137.25,48.41 U4.4 137.18,48.34 137.18,46.74 136.01,45.57 135.11,45.57 132.75,47.92 130.61,47.92 | U4.9 138.22,49.17 137.53,49.86 137.25,49.86 U4.1 137.12,49.86 133.51,49.86 C2_BAT.2 | 130.61,47.92 129.71,47.92 MCP73831.2 | U3.13 82.96,49.65 82.96,49.38 85.52,46.81 86.63,46.81 87.32,47.51 87.53,47.51 C8.2 87.6,47.58 v88.64,47.58
  Top 0.15: v92.52,51.45 92.66,51.59 93.69,51.59 C10_SUPERCAP.1 | C1_BAT2.2 137.05,37.26 133.03,37.26 132.82,37.05 C3.- 132.75,37.05 v130.54,37.05 | IC4.2 125.69,36.56 125.55,36.56 124.1,35.11 124.1,34.14 123.96,34 C1_BAT1.2 123.96,33.93 123.61,33.93 121.88,35.66 R1_PWRUSB.1 121.81,35.73 121.12,36.42 121.12,37.4 125.65,41.93 | 125.65,41.93 127.07,43.35 127.07,43.84 R2_BAT.1 | v120.98,46.54 118.62,48.89 C1_BAT.2 | v125.55,41.97 125.62,41.97 125.65,41.93 | v130.61,47.51 130.61,47.92 | 159.38,54.12 150.06,63.43 149.09,63.43 148.33,62.67 148.33,61.7 149.3,60.73 150.06,60.73 152.28,58.52 152.28,52.15 | J4.G1 15.79,85.52 15.79,86.56 16.55,87.32 16.55,90.44 15.79,91.2 J4.G2 15.72,91.27 13.85,93.14 13.85,99.31 D10.2 13.78,99.44 v12.88,99.44 | 9.87,102.45 8.45,101.04 C9.2 8.38,100.97 7.83,100.97 2.56,95.7 J4.G4 2.56,95.63 2.56,94.94 4.64,92.86 5.12,92.86 J4.P6 4.5,92.93 1.52,89.96 1.52,82.55 J4.G3 1.52,82.48 1.52,52.22 6.65,47.09 6.65,31.44 7.62,30.47 v7.62,30.4 7.69,30.33 7.69,29.29 U2.1 7.76,29.29 7.96,29.29 7.96,30.19 8.03,30.19 8.03,29.29 7.48,28.74 7.48,0.41 0.41,0.41 0.41,28.6 7.2,28.6 7.2,30.75 6.65,31.3 6.58,31.3 6.58,28.67 7.13,28.67 7.13,30.75 6.72,31.16 6.65,31.16 6.65,28.74 7.06,28.74 7.06,30.75 6.79,31.02 6.72,31.02 6.72,28.81 6.99,28.81 6.99,30.75 6.86,30.89 6.79,30.89 6.79,28.88 6.92,28.88 6.92,30.75 6.86,30.75 v6.86,28.95 | 9.87,102.45 16.76,109.35 19.32,109.35 C10.2 | v9.9,102.42 9.87,102.45 | IC1.3 48.89,94.73 49.03,94.73 50.97,96.67 50.97,97.02 51.11,97.16 54.36,97.16 55.68,95.84 C_DELAY.2 55.75,95.91 57.48,95.91 69.18,107.61 69.18,108.38 68.97,108.58 66.2,108.58 65.79,108.17 RESET_BUTTON.2 65.72,108.1 62.33,108.1 RESET_BUTTON.1 62.19,108.17 61.84,108.17 60.8,109.21 59.49,109.21 C5.2 59.42,109.28 54.85,109.28 54.22,109.9 52.63,109.9 50.76,108.03 BOOT_BUTTON.2 50.69,108.1 47.3,108.1 BOOT_BUTTON.1 47.23,108.1 47.09,108.1 45.84,109.35 44.87,109.35 C6.2 44.8,109.35 44.25,108.79 27.77,108.79 27.08,108.1 25.83,108.1 CHANGE_BUTTON.2 25.69,108.1 22.3,108.1 CHANGE_BUTTON.1 22.23,108.03 v21.12,108.03
  Top 0.15: v11.7,34.49 11.7,34.62 12.26,35.18 U2.29_1 12.26,35.25 13.43,35.25 U2.29_4 13.5,35.25 14.68,35.25 U2.29_7 14.75,35.32 14.75,36.49 U2.29_8 | 38.5,37.67 39.27,37.67 41.13,39.54 U1.9 | 38.5,37.67 38.02,37.67 | 38.02,37.67 37.33,37.67 U1.4 | U2.29_8 14.75,36.56 14.75,37.74 U2.29_9 14.82,37.74 16.48,39.4 37.81,39.4 38.02,39.2 38.02,37.67 | U2.29_3 12.26,37.74 12.26,36.56 U2.29_2 12.33,36.56 13.43,36.56 U2.29_5 13.5,36.56 14.68,36.56 U2.29_8 | U2.29_6 13.43,37.74 12.33,37.74 U2.29_3 | U2.28 7.76,46.74 7.76,42.24 12.19,37.81 U2.29_3 | D8.2 55.12,29.02 54.98,28.88 51.38,28.88 D11.2 51.24,28.81 50.69,28.81 50.07,28.18 50.07,27.29 52.7,24.65 56.09,24.65 56.23,24.52 56.23,23.61 56.09,23.48 55.05,23.48 54.85,23.68 51.94,23.68 51.59,23.34 50.48,23.34 | 38.5,31.99 43.9,31.99 46.81,29.09 D12.2 46.81,29.02 45.98,28.18 45.98,22.44 46.6,21.81 47.99,21.81 49.51,23.34 50.48,23.34 | 38.5,31.99 37.67,31.99 D9.2 | 79.5,13.71 75.83,13.71 J1.MP2 75.76,13.64 70.7,13.64 69.39,12.33 R2.1 69.32,12.19 68.9,11.77 66.34,11.77 65.51,12.6 65.51,12.74 SJ1.1 | 79.5,13.71 89.26,13.71 J1.MP1 | EPD_C8.2 79.36,20.98 80.88,20.98 EPD_C7.2 80.95,21.05 82.2,21.05 EPD_C6.2 | EPD_C6.2 82.2,21.12 82.34,21.26 82.34,27.08 C7.2 82.41,27.15 83.86,27.15 85.25,28.53 89.26,28.53 D3\.1 | EPD_C6.2 82.27,20.98 83.52,20.98 EPD_C5.2 83.65,20.98 EPD_C2.2 84.97,20.98 86.15,20.98 EPD_C1.2 86.22,20.98 v86.91,20.29 | 75.9,21.74 75.9,22.92 76.04,23.06 76.04,23.68 D6.2 | 75.9,21.74 75.9,21.05 EPD_C10.2 | v80.05,16.97 80.26,16.76 80.26,16.2 J1.17 | v84.76,16.97 84.76,16.2 J1.8 | v76.24,16.69 70.91,16.69 R4.2
  Top 0.15: v77.63,21.74 77.63,20.98 EPD_C9.2 | 72.3,19.88 71.12,19.88 EPD_C11.2 71.05,19.88 69.32,19.88 EPD_C12.2 69.25,19.88 68.07,21.05 51.73,21.05 50.48,22.3 50.48,23.34 | 72.3,19.88 v75,19.88 | v76.04,21.74 75.9,21.74 | 79.5,13.71 v79.5,14.61 | v38.5,37.53 38.5,37.67 | v38.5,32.06 38.5,31.99 | v72.3,19.94 72.3,19.88 | v13.09,20.29 11.7,20.29 11.7,25.48 8.93,28.25 7.55,28.25 7.55,28.74 7.48,28.81 7.48,30.47 7.34,30.61 7.27,30.61 7.27,30.12 7.41,30.12 7.41,29.02 7.27,29.02 7.27,28.6 0.48,21.81 0.48,0.48 7.41,0.48 7.41,28.39 7.13,28.39 6.99,28.53 0.48,28.53 0.48,21.88 7.34,15.03 7.34,0.55 0.55,0.55 0.55,21.74 7.13,28.32 7.34,28.32 7.34,15.1 0.62,8.38 0.62,0.62 7.27,0.62 7.27,14.96 0.62,21.61 0.62,21.68 7.2,28.25 7.27,28.25 7.27,15.17 0.62,8.52 0.62,8.45 7.2,1.87 7.2,0.69 0.69,0.69 0.69,8.31 7.2,14.82 7.2,14.89 0.62,21.47 0.62,21.54 7.2,28.12 7.2,28.18 6.92,28.46 0.55,28.46 0.55,21.95 7.2,15.3 7.2,15.23 0.62,8.66 0.62,8.59 7.2,2.01 7.2,1.94 6.03,0.76 0.76,0.76 0.76,8.24 7.2,14.68 7.2,14.75 0.62,21.33 0.62,21.4 7.2,27.98 7.2,28.05 6.86,28.39 0.62,28.39 0.62,22.02 5.89,16.76 5.89,16.69 0.62,11.43 0.62,8.73 7.2,2.15 7.2,2.08 5.96,0.83 0.83,0.83 0.83,8.17 7.2,14.54 7.2,14.61 0.62,21.19 0.62,21.26 7.2,27.84 7.2,27.91 6.79,28.32 0.69,28.32 0.69,22.09 5.96,16.83 7.2,18.07 7.2,27.77 6.72,28.25 0.76,28.25 0.76,22.16 5.96,16.97 6.03,16.97 7.13,18.07 7.13,27.7 6.65,28.18 0.83,28.18 0.83,22.23 6.03,17.04 7.06,18.07 7.06,27.63 6.58,28.12 0.9,28.12 0.9,22.3 6.03,17.17 6.09,17.17 6.99,18.07 6.99,27.56 6.51,28.05 0.97,28.05 0.97,22.37 6.09,17.24 6.92,18.07 6.92,27.49 6.44,27.98 1.04,27.98 1.04,22.44 6.09,17.38 6.16,17.38 6.86,18.07 6.86,27.42 6.37,27.91 1.11,27.91 1.11,22.51 6.16,17.45 6.79,18.07 6.79,27.35 6.3,27.84 1.18,27.84 1.18,22.58 6.16,17.59 6.23,17.59 6.72,18.07 6.72,27.29 6.23,27.77 1.25,27.77 1.25,22.64 6.23,17.66 6.65,18.07 6.65,27.21 6.16,27.7 1.32,27.7 1.32,22.71 6.23,17.8 6.3,17.8 6.58,18.07 6.58,27.15 6.09,27.63 1.39,27.63 1.39,22.78 6.3,17.87 6.51,18.07 6.51,27.08 6.03,27.56 1.45,27.56 1.45,22.85 6.3,18 6.37,18 6.44,18.07 6.44,27.01 5.96,27.49 1.52,27.49 1.52,22.92 5.89,18.56 5.89,18.49 0.62,13.23 0.62,11.49 7.2,4.92 7.2,2.22 5.89,0.9 0.9,0.9 0.9,8.1 5.89,13.09 5.89,13.16 0.62,18.42 0.62,21.12 6.37,26.87 6.37,26.94 5.89,27.42 1.59,27.42 1.59,22.99 5.96,18.63 6.37,19.04 6.37,26.8 5.82,27.35 1.66,27.35 1.66,23.06 5.96,18.77 6.03,18.77 6.3,19.04 6.3,26.73 5.75,27.29 1.73,27.29 1.73,23.13 6.03,18.84 6.23,19.04 6.23,20.08 4.85,20.08 2.29,22.64 2.29,22.71 1.8,23.2 1.8,27.21 5.75,27.21 5.75,27.15 1.87,23.27 4.99,20.15 5.89,20.15 5.89,26.32 5.47,26.73 2.01,23.27 5.05,20.22 5.82,20.22 5.82,26.25 5.47,26.59 2.15,23.27 5.12,20.29 5.75,20.29 5.75,26.18 5.47,26.45 2.29,23.27 5.19,20.36 5.68,20.36 5.68,26.11 5.47,26.32 2.42,23.27 5.26,20.43 5.61,20.43 5.61,26.04 5.47,26.18 2.56,23.27 5.33,20.5 5.54,20.5 5.54,25.97 5.47,26.04 2.7,23.27 5.4,20.57 5.47,20.57 5.47,25.83 5.4,25.83 2.84,23.27 2.84,23.2 2.35,22.71 2.35,22.64 4.85,20.15 4.92,20.15 5.4,20.64 5.4,25.69 5.33,25.69 2.91,23.27 2.91,23.13 2.42,22.64 4.85,20.22 5.33,20.71 5.33,25.55 5.26,25.55 2.98,23.27 2.98,23.06 2.56,22.64 4.85,20.36 5.26,20.77 5.26,25.41 5.19,25.41 3.05,23.27 3.05,22.99 2.7,22.64 4.85,20.5 5.19,20.84 5.19,25.28 5.12,25.28 3.12,23.27 3.12,22.92 2.84,22.64 4.85,20.64 5.12,20.91 5.12,25.14 5.05,25.14 3.19,23.27 3.19,22.85 2.98,22.64 4.85,20.77 5.05,20.98 5.05,25 4.99,25 3.25,23.27 3.25,22.78 3.12,22.64 4.85,20.91 4.99,21.05 4.99,24.86 4.92,24.86 3.32,23.27 3.32,22.71 3.25,22.64 4.85,21.05 4.92,21.12 4.92,24.72 4.85,24.72 3.39,23.27 3.39,22.64 4.78,21.26 4.85,21.26 4.85,24.58 4.78,24.58 3.46,23.27 3.46,22.64 4.71,21.4 4.78,21.4 4.78,24.45 4.71,24.45 3.53,23.27 3.53,22.64 4.64,21.54 4.71,21.54 4.71,24.31 4.64,24.31 3.6,23.27 3.6,22.64 4.57,21.68 4.64,21.68 4.64,24.17 4.57,24.17 3.67,23.27 3.67,22.64 4.5,21.81 4.57,21.81 4.57,24.03 4.5,24.03 3.74,23.27 3.74,22.64 4.43,21.95 4.5,21.95 4.5,23.89 4.43,23.89 3.81,23.27 3.81,22.64 4.36,22.09 4.43,22.09 4.43,23.75 4.36,23.75 3.88,23.27 3.88,22.64 4.29,22.23 4.36,22.23 4.36,23.61 4.29,23.61 3.95,23.27 3.95,22.64 4.22,22.37 4.29,22.37 4.29,23.48 4.22,23.48 4.02,23.27 4.02,22.64 4.16,22.51 4.22,22.51 4.22,23.34 4.16,23.34 4.09,23.27 4.09,22.64 4.16,22.64 v4.16,23.27
  Top 0.15: v55.75,24.79 55.68,24.86 v54.22,24.86 | v45.77,24.72 v45.77,25.21 | v32.41,21.68 v32.41,23.75 | v2.29,26.59 1.87,26.59 1.87,27.15 5.61,27.15 5.61,27.08 1.94,23.41 1.87,23.41 1.87,26.52 4.99,26.52 5.47,27.01 5.47,27.08 1.94,27.08 1.94,26.66 5.05,26.66 5.33,26.94 5.33,27.01 2.01,27.01 2.01,26.73 5.05,26.73 5.19,26.87 5.19,26.94 2.08,26.94 2.08,26.8 5.05,26.8 5.05,26.87 v4.22,26.87 | v4.16,20.64 2.22,22.58 0.69,21.05 0.69,18.42 0.62,18.35 0.62,13.3 7.2,6.72 7.2,4.99 3.19,0.97 0.97,0.97 0.97,8.03 5.89,12.95 5.89,13.02 0.69,18.21 0.69,18.28 3.53,21.12 2.22,22.44 0.76,20.98 0.76,18.42 5.96,13.23 7.2,14.47 0.83,20.84 0.83,20.91 2.22,22.3 3.39,21.12 0.83,18.56 0.83,18.49 5.96,13.37 7.06,14.47 0.83,20.71 0.83,20.77 2.22,22.16 3.25,21.12 0.83,18.7 0.83,18.63 5.96,13.5 6.92,14.47 0.83,20.57 0.83,20.64 2.22,22.02 3.12,21.12 0.83,18.84 0.83,18.77 5.96,13.64 6.79,14.47 0.83,20.43 0.83,20.5 2.22,21.88 2.98,21.12 0.83,18.97 0.83,18.91 5.96,13.78 6.65,14.47 6.3,14.82 6.3,14.89 7.2,15.79 7.2,17.94 7.13,17.94 6.16,16.97 6.16,16.9 7.13,15.93 7.13,15.79 6.99,15.65 6.92,15.65 6.09,16.48 0.69,11.08 0.69,8.79 7.13,2.35 7.13,2.29 5.82,0.97 3.25,0.97 1.04,3.19 1.04,7.96 5.96,12.88 7.2,12.88 7.2,14.34 7.13,14.34 6.16,13.37 6.16,13.3 6.51,12.95 7.13,12.95 7.13,14.2 7.06,14.2 6.23,13.37 6.23,13.3 6.51,13.02 7.06,13.02 7.06,14.06 6.99,14.06 6.3,13.37 6.3,13.3 6.51,13.09 6.99,13.09 6.99,13.92 6.92,13.92 6.37,13.37 6.37,13.3 6.51,13.16 6.92,13.16 6.92,13.78 6.86,13.78 6.44,13.37 6.44,13.3 6.51,13.23 6.86,13.23 6.86,13.64 6.79,13.64 6.51,13.37 6.51,13.3 6.79,13.3 6.79,13.5 6.72,13.5 6.65,13.43 6.65,13.37 6.72,13.37 v6.72,13.43
  Top 0.15: v7.62,11.36 7.55,11.36 7.55,28.18 8.93,28.18 11.63,25.48 11.63,20.5 9.49,20.5 | 9.49,20.5 7.62,20.5 7.62,28.12 8.93,28.12 11.56,25.48 11.56,20.57 7.69,20.57 7.69,28.05 8.93,28.05 11.49,25.48 11.49,20.64 7.76,20.64 7.76,27.98 8.93,27.98 11.43,25.48 11.43,20.71 7.83,20.71 7.83,27.91 8.93,27.91 11.36,25.48 11.36,20.77 7.89,20.77 7.89,27.84 8.93,27.84 11.29,25.48 11.29,20.84 7.96,20.84 7.96,27.77 8.93,27.77 11.22,25.48 11.22,20.91 8.03,20.91 8.03,27.7 8.93,27.7 11.15,25.48 11.15,20.98 8.1,20.98 8.1,27.63 8.93,27.63 11.08,25.48 11.08,21.05 8.17,21.05 8.17,27.56 8.93,27.56 11.01,25.48 11.01,21.12 8.24,21.12 8.24,27.49 8.93,27.49 10.94,25.48 10.94,21.19 8.31,21.19 8.31,27.42 8.93,27.42 10.87,25.48 10.87,21.26 8.38,21.26 8.38,27.35 8.93,27.35 10.8,25.48 10.8,21.33 8.45,21.33 8.45,27.29 8.93,27.29 10.73,25.48 10.73,21.4 8.52,21.4 8.52,27.21 8.93,27.21 10.66,25.48 10.66,21.47 8.59,21.47 8.59,27.15 8.93,27.15 10.6,25.48 10.6,21.54 8.66,21.54 8.66,27.08 8.93,27.08 10.53,25.48 10.53,21.61 8.73,21.61 8.73,27.01 8.93,27.01 10.46,25.48 10.46,21.68 8.79,21.68 8.79,26.94 8.93,26.94 10.39,25.48 10.39,21.74 8.86,21.74 8.86,26.87 8.93,26.87 10.32,25.48 10.32,21.81 8.93,21.81 8.93,26.73 9,26.73 10.25,25.48 10.25,21.88 9,21.88 9,26.59 9.07,26.59 10.18,25.48 10.18,21.95 9.07,21.95 9.07,26.45 9.14,26.45 10.11,25.48 10.11,22.02 9.14,22.02 9.14,26.32 9.21,26.32 10.04,25.48 10.04,22.09 9.21,22.09 9.21,26.18 9.28,26.18 9.97,25.48 9.97,22.16 9.28,22.16 9.28,26.04 9.35,26.04 9.9,25.48 9.9,22.23 9.35,22.23 9.35,25.9 9.42,25.9 9.83,25.48 9.83,22.3 9.42,22.3 9.42,25.76 9.49,25.76 9.76,25.48 9.76,22.37 9.49,22.37 9.49,25.62 9.56,25.62 9.7,25.48 9.7,22.44 9.56,22.44 9.56,25.48 9.63,25.48 v9.63,22.51
  Top 0.15: v5.96,20.43 5.96,26.38 5.54,26.8 5.82,27.08 6.23,26.66 6.23,20.5 6.03,20.5 6.03,26.45 5.68,26.8 5.82,26.94 6.16,26.59 6.16,20.57 6.09,20.57 6.09,26.52 v5.82,26.8 | v11.77,33.86 11.49,34.14 v11.22,34.14 | v11.77,45.64 13.57,45.64 14.2,45.01 v14.2,45 | 9.49,20.5 9.49,0.41 7.62,0.41 7.62,11.22 7.69,11.22 9.42,9.49 9.42,0.48 7.69,0.48 7.69,11.08 7.76,11.08 9.35,9.49 9.35,0.55 7.76,0.55 7.76,10.94 7.83,10.94 9.28,9.49 9.28,0.62 7.83,0.62 7.83,10.8 7.89,10.8 9.21,9.49 9.21,0.69 7.89,0.69 7.89,10.66 7.96,10.66 9.14,9.49 9.14,0.76 7.96,0.76 7.96,10.53 8.03,10.53 9.07,9.49 9.07,0.83 8.03,0.83 8.03,10.39 8.1,10.39 9,9.49 9,0.9 8.1,0.9 8.1,10.25 8.17,10.25 8.93,9.49 8.93,0.97 8.17,0.97 8.17,10.11 8.24,10.11 8.86,9.49 8.86,1.04 8.24,1.04 8.24,9.97 8.31,9.97 8.79,9.49 8.79,1.11 8.31,1.11 8.31,9.83 8.38,9.83 8.73,9.49 8.73,1.18 8.38,1.18 8.38,9.7 8.45,9.7 8.66,9.49 8.66,1.25 8.45,1.25 8.45,9.56 8.52,9.56 8.59,9.49 8.59,1.32 8.52,1.32 v8.52,9.49 | v9.9,11.01 9.56,11.01 9.56,11.08 148.13,11.08 158.79,0.41 169.8,0.41 169.8,15.72 165.02,15.72 159.14,9.83 159.14,0.48 158.79,0.48 155.88,3.39 152.9,0.41 92.66,0.41 92.66,11.01 9.97,11.01 9.56,10.6 9.56,0.41 73.61,0.41 73.61,10.94 9.97,10.94 9.63,10.6 9.63,0.48 73.54,0.48 73.54,10.87 9.97,10.87 9.7,10.6 9.7,0.55 73.47,0.55 73.47,10.8 9.97,10.8 9.76,10.6 9.76,0.62 73.41,0.62 73.41,10.73 9.97,10.73 9.83,10.6 9.83,0.69 73.34,0.69 73.34,10.66 9.97,10.66 9.9,10.6 9.9,0.76 73.27,0.76 73.27,10.6 9.97,10.6 9.97,0.83 73.2,0.83 73.2,10.53 10.04,10.53 10.04,0.9 73.13,0.9 73.13,10.46 10.11,10.46 10.11,0.97 73.06,0.97 73.06,10.39 10.18,10.39 10.18,1.04 72.99,1.04 72.99,10.32 10.25,10.32 10.25,1.11 72.92,1.11 72.92,10.25 10.32,10.25 10.32,1.18 72.85,1.18 72.85,10.18 10.39,10.18 10.39,1.25 72.78,1.25 72.78,10.11 10.46,10.11 10.46,1.32 72.71,1.32 72.71,10.04 10.53,10.04 10.53,1.39 72.64,1.39 72.64,9.97 10.6,9.97 10.6,1.45 72.57,1.45 72.57,9.9 10.66,9.9 10.66,1.52 72.5,1.52 72.5,9.83 10.73,9.83 10.73,1.59 72.44,1.59 72.44,9.76 10.8,9.76 10.8,1.66 72.37,1.66 72.37,9.7 10.87,9.7 10.87,1.73 72.3,1.73 72.3,9.63 10.94,9.63 10.94,1.8 72.23,1.8 72.23,9.56 11.01,9.56 11.01,1.87 72.16,1.87 72.16,9.49 11.08,9.49 11.08,1.94 72.09,1.94 72.09,9.42 11.15,9.42 11.15,2.01 72.02,2.01 72.02,9.35 11.22,9.35 11.22,2.08 71.95,2.08 71.95,9.28 11.29,9.28 11.29,2.15 71.88,2.15 71.88,9.21 11.36,9.21 11.36,2.22 71.81,2.22 71.81,9.14 11.43,9.14 11.43,2.29 71.74,2.29 71.74,9.07 11.49,9.07 11.49,2.35 71.67,2.35 71.67,9 11.56,9 11.56,2.42 71.61,2.42 71.61,8.93 11.63,8.93 11.63,2.49 71.53,2.49 71.53,8.86 11.7,8.86 11.7,2.56 71.47,2.56 71.47,8.79 11.77,8.79 11.77,2.63 71.4,2.63 71.4,8.73 11.84,8.73 11.84,2.7 71.33,2.7 71.33,8.66 11.91,8.66 11.91,2.77 71.26,2.77 71.26,8.59 11.98,8.59 11.98,2.84 71.19,2.84 71.19,8.52 12.05,8.52 12.05,2.91 71.12,2.91 71.12,8.45 12.12,8.45 12.12,2.98 71.05,2.98 71.05,8.38 12.19,8.38 12.19,3.05 70.98,3.05 70.98,8.31 12.26,8.31 12.26,3.12 70.91,3.12 70.91,8.24 12.33,8.24 12.33,3.19 70.84,3.19 70.84,8.17 12.4,8.17 12.4,3.25 70.77,3.25 70.77,8.1 12.46,8.1 12.46,3.32 70.7,3.32 70.7,8.03 12.53,8.03 12.53,3.39 70.64,3.39 70.64,7.96 12.6,7.96 12.6,3.46 70.57,3.46 70.57,7.89 12.67,7.89 12.67,3.53 70.5,3.53 70.5,7.83 12.74,7.83 12.74,3.6 70.43,3.6 70.43,7.76 12.81,7.76 12.81,3.67 70.36,3.67 70.36,7.69 12.88,7.69 12.88,3.74 70.29,3.74 70.29,7.62 12.95,7.62 12.95,3.81 70.22,3.81 70.22,7.55 13.02,7.55 13.02,3.88 70.15,3.88 70.15,7.48 13.09,7.48 13.09,3.95 70.08,3.95 70.08,7.41 13.16,7.41 13.16,4.02 70.01,4.02 70.01,7.34 13.23,7.34 13.23,4.09 69.94,4.09 69.94,7.27 13.3,7.27 13.3,4.16 69.87,4.16 69.87,7.2 13.37,7.2 13.37,4.22 69.8,4.22 69.8,7.13 13.43,7.13 13.43,4.29 69.73,4.29 69.73,7.06 13.5,7.06 13.5,4.36 69.67,4.36 69.67,6.99 13.57,6.99 13.57,4.43 69.6,4.43 69.6,6.92 13.64,6.92 13.64,4.5 69.53,4.5 69.53,6.86 13.71,6.86 13.71,4.57 69.46,4.57 69.46,6.79 13.78,6.79 13.78,4.64 69.39,4.64 69.39,6.72 13.85,6.72 13.85,4.71 69.32,4.71 69.32,6.65 13.92,6.65 13.92,4.78 69.25,4.78 69.25,6.58 13.99,6.58 13.99,4.85 69.18,4.85 69.18,6.51 14.06,6.51 14.06,4.92 69.11,4.92 69.11,6.44 14.13,6.44 14.13,4.99 69.04,4.99 69.04,6.37 14.2,6.37 14.2,5.05 68.97,5.05 68.97,6.3 14.27,6.3 14.27,5.12 68.9,5.12 68.9,6.23 14.34,6.23 14.34,5.19 68.83,5.19 68.83,6.16 14.4,6.16 14.4,5.26 68.77,5.26 68.77,6.09 14.47,6.09 14.47,5.33 68.7,5.33 68.7,6.03 14.54,6.03 14.54,5.4 68.63,5.4 68.63,5.96 14.61,5.96 14.61,5.47 68.56,5.47 68.56,5.89 14.68,5.89 14.68,5.54 68.49,5.54 68.49,5.82 14.75,5.82 14.75,5.61 68.42,5.61 68.42,5.75 14.82,5.75 14.82,5.68 v68.35,5.68
  Top 0.15: v66.62,11.15 13.5,11.15 13.5,23.68 11.91,25.28 11.84,25.28 11.84,20.43 13.16,20.43 13.43,20.71 13.43,23.68 11.98,25.14 11.91,25.14 11.91,20.5 13.16,20.5 13.37,20.71 13.37,23.68 12.05,25 11.98,25 11.98,20.57 13.16,20.57 13.3,20.71 13.3,23.68 12.12,24.86 12.05,24.86 12.05,20.64 13.16,20.64 13.23,20.71 13.23,23.68 12.19,24.72 12.12,24.72 12.12,20.71 13.16,20.71 13.16,23.68 12.26,24.58 12.19,24.58 12.19,20.77 13.09,20.77 13.09,23.68 12.33,24.45 12.26,24.45 12.26,20.84 13.02,20.84 13.02,23.68 12.4,24.31 12.33,24.31 12.33,20.91 12.95,20.91 12.95,23.68 12.46,24.17 12.4,24.17 12.4,20.98 12.88,20.98 12.88,23.68 12.53,24.03 12.46,24.03 12.46,21.05 12.81,21.05 12.81,23.68 12.6,23.89 12.53,23.89 12.53,21.12 12.74,21.12 12.74,23.68 12.67,23.75 12.6,23.75 12.6,21.19 12.67,21.19 v12.67,23.68 | v13.23,26.04 13.92,26.04 14.54,25.41 18.42,25.41 18.84,25.83 24.52,25.83 31.65,32.96 v31.7,33